# Altium PCB 驱动板.PcbDoc (part 3 of 3)
Units mil, origin at the board's own origin, x right, y up, seen from the top; angles counter-clockwise.
Board outline 6410.42 x 3130.03 mil, 2 copper layers (Top Layer, Bottom Layer); 60 components, 47 nets, 216 pads, 52 vias.
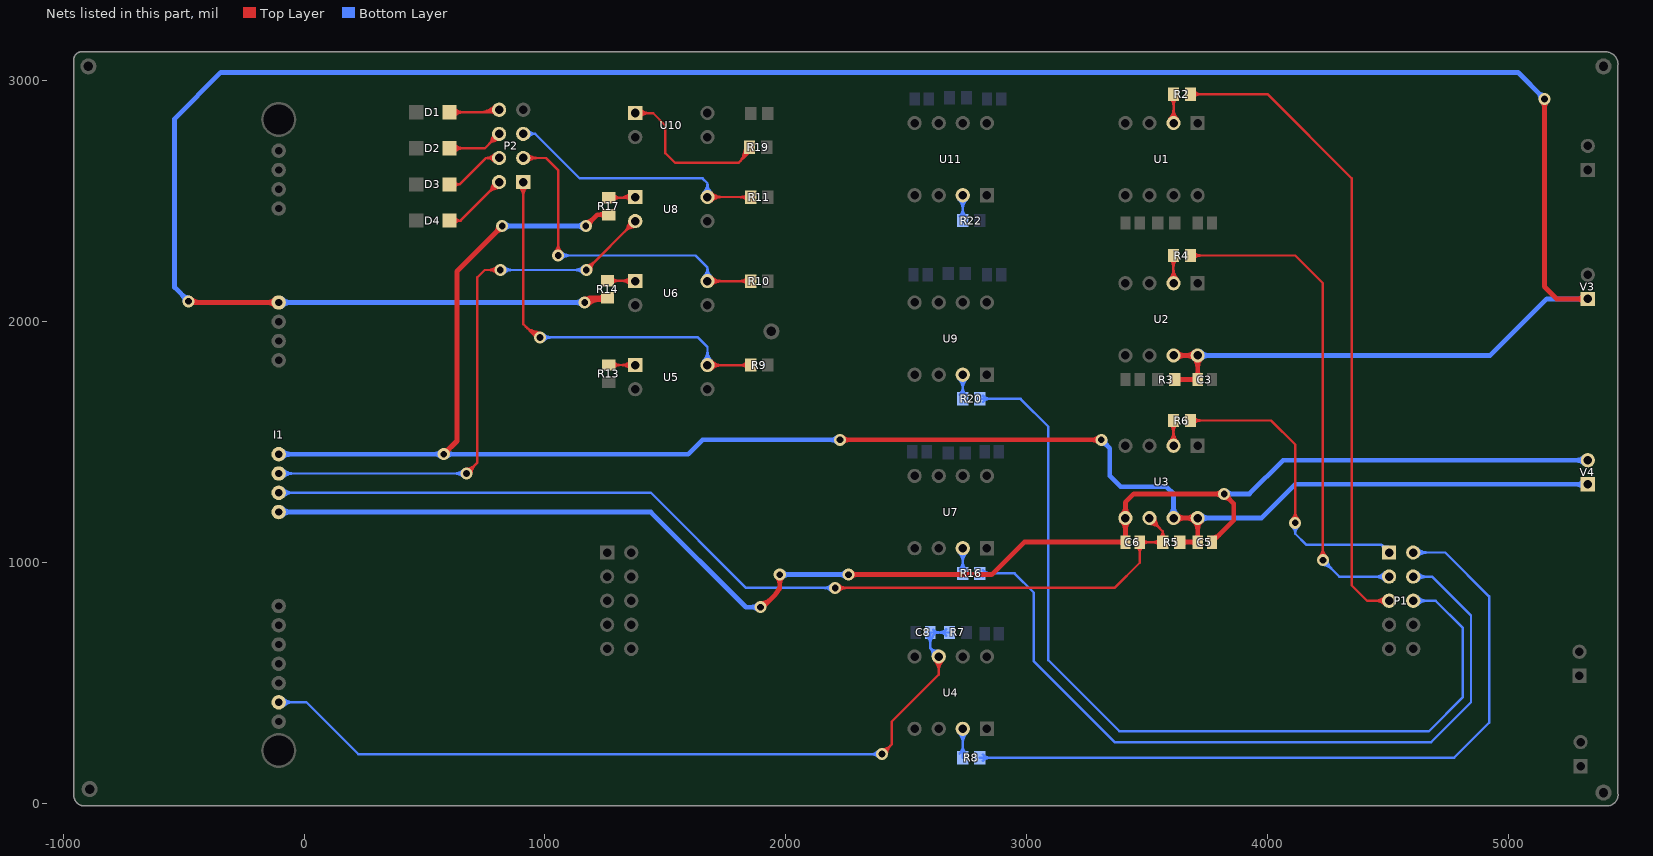
[diagram p3: the nets of this part, all layers, seen from the top]

## Via types
v1: diameter 50, hole 28, Top Layer to Bottom Layer, 52 vias

## Nets (pads, with @x,y where several pads share a name; then routed paths per layer and width w, separated by ;. In a path a pad name is that pad's centre, name@x,y a point inside that pad or via, vN(x,y) a via of type N, cw(c..) or ccw(c..) an arc to the next point about the centre after c; other vN are vias at no path point) (continued)
IPM_VVCC: C3.2 I1.5 R3.1 R14.2 U2.7 U2.8 V3.1 | length 13895.3
  Top Layer w20: v1(-480,2085) -475,2080 I1.5@-105,2080 ; v1(1165,2080) 1184.57,2099.57 ; v1@1168.88,2094.49 ccw(c1173.99,2113.54) 1183.85,2096.46 ; v1@1173,2092.69 ccw(c1194.45,2126.68) 1214.54,2091.87 ; v1@1179.88,2081.89 cw(c1197.09,2084.07) 1188.41,2099.1 ; 1219.19,2091.73 cw(c1229.45,2053.46) R14.2@1249.25,2087.77 ; 1228.38,2094.19 ccw(c1221.61,2119.46) R14.2@1244.27,2106.38 ; R14.2@1260,2099.57 1184.57,2099.57 ; U2.7@3610,1860 U2.8@3710,1860 3710.47,1859.53 C3.2@3710.47,1760 R3.1@3615.43,1760 ; v1(5150,2925) 5150,2145 5200,2095 V3.1@5330,2095 ; -153.28,2080 cw(c-153.28,2031.72) -119.14,2065.86 ccw(c-153.28,2031.72) -153.28,2080 ; -153.28,2080 ccw(c-153.28,2128.28) -119.14,2094.14 cw(c-153.28,2128.28) -153.28,2080 ; 1184.57,2099.57 cw(c1171.82,2112.31) 1168.1,2094.68 ccw(c1171.82,2112.31) 1184.57,2099.57 ; 1184.57,2099.57 ccw(c1197.31,2086.82) 1179.68,2083.1 cw(c1197.31,2086.82) 1184.57,2099.57 ; 1223.18,2099.57 cw(c1223.18,2066.68) 1246.43,2089.93 ccw(c1223.18,2066.68) 1223.18,2099.57 ; 1223.18,2099.57 ccw(c1223.18,2132.45) 1246.43,2109.2 cw(c1223.18,2132.45) 1223.18,2099.57 ; 3648.32,1760 cw(c3648.32,1792.89) 3625.07,1769.63 ccw(c3648.32,1792.89) 3648.32,1760 ; 3648.32,1760 ccw(c3648.32,1727.11) 3625.07,1750.37 cw(c3648.32,1727.11) 3648.32,1760 ; 3657.14,1860 cw(c3657.14,1907.14) 3623.81,1873.81 ccw(c3657.14,1907.14) 3657.14,1860 ; 3657.14,1860 ccw(c3657.14,1812.86) 3623.81,1846.19 cw(c3657.14,1812.86) 3657.14,1860 ; 3662.86,1860 cw(c3662.86,1812.86) U2.8@3696.19,1846.19 ; 3662.86,1860 ccw(c3662.86,1907.14) 3696.19,1873.81 cw(c3662.86,1907.14) 3662.86,1860 ; 3662.86,1860 cw(c3662.86,1812.86) U2.8@3696.19,1846.19 ; 3682.34,1760 cw(c3682.34,1731.87) 3702.23,1751.76 ccw(c3682.34,1731.87) 3682.34,1760 ; 3682.34,1760 ccw(c3682.34,1788.13) 3702.23,1768.24 cw(c3682.34,1788.13) 3682.34,1760 ; U2.8@3696.19,1846.19 cw(c3661.72,1811.72) 3710.47,1811.72 ccw(c3661.72,1811.72) U2.8@3696.19,1846.19 ; 3710.47,1794.04 cw(c3682.34,1794.04) 3702.23,1774.15 ccw(c3682.34,1794.04) 3710.47,1794.04 ; 3710.47,1794.04 ccw(c3738.61,1794.04) 3718.71,1774.15 cw(c3738.61,1794.04) 3710.47,1794.04 ; 5150,2888.79 cw(c5186.21,2888.79) 5160.61,2914.39 ccw(c5186.21,2888.79) 5150,2888.79 ; 5150,2888.79 ccw(c5113.79,2888.79) 5139.39,2914.39 cw(c5113.79,2888.79) 5150,2888.79 ; 5282.86,2095 cw(c5282.86,2047.86) 5316.19,2081.19 ccw(c5282.86,2047.86) 5282.86,2095 ; 5282.86,2095 ccw(c5282.86,2142.14) 5316.19,2108.81 cw(c5282.86,2142.14) 5282.86,2095 ; v1@-469.39,2095.61 ccw(c-431.72,2133.28) -431.72,2080 cw(c-431.72,2133.28) v1@-469.39,2095.61 ; v1@1161.46,2083.54 cw(c1200.17,2044.83) 1200.17,2099.57 ccw(c1200.17,2044.83) v1@1161.46,2083.54 ; v1@1175.61,2069.39 cw(c1248.45,1996.55) 1248.45,2099.57 ccw(c1248.45,1996.55) v1@1175.61,2069.39 ; 3710.47,1814 cw(c3756,1814) 3723.81,1846.19 ccw(c3756,1814) 3710.47,1814
  Bottom Layer w20: v1(-480,2085) -537.5,2142.5 -537.5,2842.5 -345,3035 5040,3035 v1@5145,2930 ; I1.5@-105,2080 v1(1165,2080) ; U2.8@3710,1860 4925,1860 5160,2095 V3.1@5330,2095 ; -505.61,2110.61 cw(c-531.21,2085) -495,2085 ccw(c-531.21,2085) -505.61,2110.61 ; -505.61,2110.61 ccw(c-480,2136.21) -480,2100 cw(c-480,2136.21) -505.61,2110.61 ; -56.72,2080 cw(c-56.72,2128.28) -90.86,2094.14 ccw(c-56.72,2128.28) -56.72,2080 ; -56.72,2080 ccw(c-56.72,2031.72) -90.86,2065.86 cw(c-56.72,2031.72) -56.72,2080 ; 1128.79,2080 cw(c1128.79,2043.79) 1154.39,2069.39 ccw(c1128.79,2043.79) 1128.79,2080 ; 1128.79,2080 ccw(c1128.79,2116.21) 1154.39,2090.61 cw(c1128.79,2116.21) 1128.79,2080 ; 3757.14,1860 cw(c3757.14,1907.14) 3723.81,1873.81 ccw(c3757.14,1907.14) 3757.14,1860 ; 3757.14,1860 ccw(c3757.14,1812.86) 3723.81,1846.19 cw(c3757.14,1812.86) 3757.14,1860 ; 5124.39,2950.61 cw(c5098.79,2925) 5135,2925 ccw(c5098.79,2925) 5124.39,2950.61 ; 5124.39,2950.61 ccw(c5150,2976.21) 5150,2940 cw(c5150,2976.21) 5124.39,2950.61 ; 5282.86,2095 cw(c5282.86,2047.86) 5316.19,2081.19 ccw(c5282.86,2047.86) 5282.86,2095 ; 5282.86,2095 ccw(c5282.86,2142.14) 5316.19,2108.81 cw(c5282.86,2142.14) 5282.86,2095
IPM_WFO: I1.10 U8.2 | length 4114.7
  Top Layer w10: 700.2,1396.75 ccw(c709.24,1362.99) v1(675,1370) ; 701.75,1395.2 cw(c667.99,1404.24) v1(675,1370) ; v1(815,2215) 750,2215 720,2185 720,1415 v1(675,1370) ; 1197.42,2241.75 ccw(c1206.47,2207.99) v1(1172.22,2215) ; 1198.97,2240.2 cw(c1165.21,2249.24) v1(1172.22,2215) ; 1344.48,2395.43 cw(c1381.61,2385.48) U8.2@1373.9,2423.14 ; 1352.65,2387.26 ccw(c1342.7,2424.39) U8.2@1380.36,2416.68 ; U8.2@1375,2417.78 v1(1172.22,2215) ; 709.14,1404.14 cw(c675,1438.28) 675,1390 ccw(c675,1438.28) 709.14,1404.14 ; 709.14,1404.14 ccw(c743.28,1370) 695,1370 cw(c743.28,1370) 709.14,1404.14 ; 766.72,2215 cw(c766.72,2166.72) 800.86,2200.86 ccw(c766.72,2166.72) 766.72,2215 ; 766.72,2215 ccw(c766.72,2263.28) 800.86,2229.14 cw(c766.72,2263.28) 766.72,2215 ; 1206.36,2249.14 cw(c1172.22,2283.28) 1172.22,2235 ccw(c1172.22,2283.28) 1206.36,2249.14 ; 1206.36,2249.14 ccw(c1240.51,2215) 1192.22,2215 cw(c1240.51,2215) 1206.36,2249.14 ; 1333.13,2375.91 cw(c1375,2334.04) 1375,2393.25 ccw(c1375,2334.04) 1333.13,2375.91 ; 1333.13,2375.91 ccw(c1291.26,2417.78) 1350.47,2417.78 cw(c1291.26,2417.78) 1333.13,2375.91 ; 1350.2,2392.98 cw(c1375,2368.18) 1375,2403.25 ccw(c1375,2368.18) 1350.2,2392.98 ; 1350.2,2392.98 ccw(c1325.4,2417.78) 1360.47,2417.78 cw(c1325.4,2417.78) 1350.2,2392.98
  Bottom Layer w10: I1.10@-105,1370 v1(675,1370) ; v1(815,2215) v1(1172.22,2215) ; -68.79,1370 cw(c-68.79,1406.21) -94.39,1380.61 ccw(c-68.79,1406.21) -68.79,1370 ; -68.79,1370 ccw(c-68.79,1333.79) -94.39,1359.39 cw(c-68.79,1333.79) -68.79,1370 ; -44.64,1370 cw(c-44.64,1430.36) -87.32,1387.68 ccw(c-44.64,1430.36) -44.64,1370 ; -44.64,1370 ccw(c-44.64,1309.64) -87.32,1352.32 cw(c-44.64,1309.64) -44.64,1370 ; 626.72,1370 cw(c626.72,1321.72) 660.86,1355.86 ccw(c626.72,1321.72) 626.72,1370 ; 626.72,1370 ccw(c626.72,1418.28) 660.86,1384.14 cw(c626.72,1418.28) 626.72,1370 ; 863.28,2215 cw(c863.28,2263.28) 829.14,2229.14 ccw(c863.28,2263.28) 863.28,2215 ; 863.28,2215 ccw(c863.28,2166.72) 829.14,2200.86 cw(c863.28,2166.72) 863.28,2215 ; 1123.94,2215 cw(c1123.94,2166.72) 1158.08,2200.86 ccw(c1123.94,2166.72) 1123.94,2215 ; 1123.94,2215 ccw(c1123.94,2263.28) 1158.08,2229.14 cw(c1123.94,2263.28) 1123.94,2215
IPM_WGND: C5.1 C6.1 I1.12 U3.5 V4.2 | length 8081
  Top Layer w20: v1(1895,815) 1915,825 1955,865 1975,895 v1(1975,950) ; v1(2260,950) 2855,950 2990,1085 C6.1@3410.47,1085 3410.47,1184.53 U3.5@3410,1185 3410,1250 3445,1285 v1(3820,1285) 3860,1245 3860,1175.47 C5.1@3769.53,1085 ; 1975,913.79 cw(c2011.21,913.79) 1985.61,939.39 ccw(c2011.21,913.79) 1975,913.79 ; 1975,913.79 ccw(c1938.79,913.79) 1964.39,939.39 cw(c1938.79,913.79) 1975,913.79 ; 2296.21,950 cw(c2296.21,986.21) 2270.61,960.61 ccw(c2296.21,986.21) 2296.21,950 ; 2296.21,950 ccw(c2296.21,913.79) 2270.61,939.39 cw(c2296.21,913.79) 2296.21,950 ; 3382.34,1085 cw(c3382.34,1056.87) 3402.23,1076.76 ccw(c3382.34,1056.87) 3382.34,1085 ; 3382.34,1085 ccw(c3382.34,1113.13) 3402.23,1093.24 cw(c3382.34,1113.13) 3382.34,1085 ; 3410,1232.14 cw(c3362.86,1232.14) 3396.19,1198.81 ccw(c3362.86,1232.14) 3410,1232.14 ; 3410,1232.14 ccw(c3457.14,1232.14) 3423.81,1198.81 cw(c3457.14,1232.14) 3410,1232.14 ; 3410.47,1119.04 cw(c3382.34,1119.04) 3402.23,1099.15 ccw(c3382.34,1119.04) 3410.47,1119.04 ; 3410.47,1119.04 ccw(c3438.61,1119.04) 3418.71,1099.15 cw(c3438.61,1119.04) 3410.47,1119.04 ; 3783.79,1285 cw(c3783.79,1248.79) 3809.39,1274.39 ccw(c3783.79,1248.79) 3783.79,1285 ; 3783.79,1285 ccw(c3783.79,1321.21) 3809.39,1295.61 cw(c3783.79,1321.21) 3783.79,1285 ; 3845.61,1259.39 cw(c3871.21,1285) 3835,1285 ccw(c3871.21,1285) 3845.61,1259.39 ; 3845.61,1259.39 ccw(c3820,1233.79) 3820,1270 cw(c3820,1233.79) 3845.61,1259.39 ; v1@1895,830 ccw(c1895,890.36) 1937.68,847.68 cw(c1895,890.36) v1@1895,830 ; U3.5@3396.19,1171.19 cw(c3361.72,1136.72) 3410.47,1136.72 ccw(c3361.72,1136.72) U3.5@3396.19,1171.19 ; 3410.47,1139 cw(c3456,1139) 3423.81,1171.19 ccw(c3456,1139) 3410.47,1139 ; C5.1@3769.53,1102.56 ccw(c3769.53,1144.95) 3799.5,1114.98 cw(c3769.53,1144.95) C5.1@3769.53,1102.56
  Bottom Layer w20: I1.12@-105,1210 1440,1210 1835,815 v1(1895,815) ; v1(1975,950) v1(2260,950) ; v1(3820,1285) 3925,1285 4065,1425 V4.2@5330,1425 ; -56.72,1210 cw(c-56.72,1258.28) -90.86,1224.14 ccw(c-56.72,1258.28) -56.72,1210 ; -56.72,1210 ccw(c-56.72,1161.72) -90.86,1195.86 cw(c-56.72,1161.72) -56.72,1210 ; 1858.79,815 cw(c1858.79,778.79) 1884.39,804.39 ccw(c1858.79,778.79) 1858.79,815 ; 1858.79,815 ccw(c1858.79,851.21) 1884.39,825.61 cw(c1858.79,851.21) 1858.79,815 ; 2011.21,950 cw(c2011.21,986.21) 1985.61,960.61 ccw(c2011.21,986.21) 2011.21,950 ; 2011.21,950 ccw(c2011.21,913.79) 1985.61,939.39 cw(c2011.21,913.79) 2011.21,950 ; 2223.79,950 cw(c2223.79,913.79) 2249.39,939.39 ccw(c2223.79,913.79) 2223.79,950 ; 2223.79,950 ccw(c2223.79,986.21) 2249.39,960.61 cw(c2223.79,986.21) 2223.79,950 ; 3856.21,1285 cw(c3856.21,1321.21) 3830.61,1295.61 ccw(c3856.21,1321.21) 3856.21,1285 ; 3856.21,1285 ccw(c3856.21,1248.79) 3830.61,1274.39 cw(c3856.21,1248.79) 3856.21,1285 ; 5282.86,1425 cw(c5282.86,1377.86) 5316.19,1411.19 ccw(c5282.86,1377.86) 5282.86,1425 ; 5282.86,1425 ccw(c5282.86,1472.14) 5316.19,1438.81 cw(c5282.86,1472.14) 5282.86,1425
IPM_WN: C8.2 I1.18 R7.2 U4.6 | length 4891.5
  Top Layer w10: 2425.2,231.75 ccw(c2434.24,197.99) v1(2400,205) ; 2426.75,230.2 cw(c2392.99,239.24) v1(2400,205) ; U4.6@2635,610 2635,535 2440,340 2440,245 v1(2400,205) ; 2434.14,239.14 cw(c2400,273.28) 2400,225 ccw(c2400,273.28) 2434.14,239.14 ; 2434.14,239.14 ccw(c2468.28,205) 2420,205 cw(c2468.28,205) 2434.14,239.14 ; 2635,550.79 cw(c2694.21,550.79) 2652.34,592.66 ccw(c2694.21,550.79) 2635,550.79 ; 2635,550.79 ccw(c2575.79,550.79) 2617.66,592.66 cw(c2575.79,550.79) 2635,550.79 ; 2635,574.93 cw(c2670.07,574.93) 2645.27,599.73 ccw(c2670.07,574.93) 2635,574.93 ; 2635,574.93 ccw(c2599.93,574.93) 2624.73,599.73 cw(c2599.93,574.93) 2635,574.93
  Bottom Layer w10: I1.18@-105,420 10,420 225,205 v1(2400,205) ; U4.6@2635,610 2599.53,645.47 ; R7.2@2679.57,710 C8.2@2599.53,710 2599.53,645.47 ; -68.79,420 cw(c-68.79,456.21) -94.39,430.61 ccw(c-68.79,456.21) -68.79,420 ; -68.79,420 ccw(c-68.79,383.79) -94.39,409.39 cw(c-68.79,383.79) -68.79,420 ; -44.64,420 cw(c-44.64,480.36) -87.32,437.68 ccw(c-44.64,480.36) -44.64,420 ; -44.64,420 ccw(c-44.64,359.64) -87.32,402.32 cw(c-44.64,359.64) -44.64,420 ; 2351.72,205 cw(c2351.72,156.72) 2385.86,190.86 ccw(c2351.72,156.72) 2351.72,205 ; 2351.72,205 ccw(c2351.72,253.28) 2385.86,219.14 cw(c2351.72,253.28) 2351.72,205 ; 2599.53,645.47 cw(c2571.93,617.87) 2610.66,613.04 ccw(c2571.93,617.87) 2599.53,645.47 ; 2599.53,645.47 ccw(c2627.13,673.07) 2631.96,634.34 cw(c2627.13,673.07) 2599.53,645.47 ; 2599.53,663.89 cw(c2639.73,663.89) 2611.3,692.32 ccw(c2639.73,663.89) 2599.53,663.89 ; 2599.53,663.89 ccw(c2559.32,663.89) 2587.75,692.32 cw(c2559.32,663.89) 2599.53,663.89 ; 2613.99,631.01 cw(c2597.64,614.66) 2620.58,611.8 ccw(c2597.64,614.66) 2613.99,631.01 ; 2613.99,631.01 ccw(c2630.34,647.36) 2633.2,624.42 cw(c2630.34,647.36) 2613.99,631.01 ; 2634.61,710 cw(c2634.61,665.04) 2666.4,696.83 ccw(c2634.61,665.04) 2634.61,710 ; 2634.61,710 ccw(c2634.61,754.96) 2666.4,723.17 cw(c2634.61,754.96) 2634.61,710 ; 2639.73,710 cw(c2639.73,750.21) 2611.3,721.78 ccw(c2639.73,750.21) 2639.73,710 ; 2639.73,710 ccw(c2639.73,669.79) 2611.3,698.22 cw(c2639.73,669.79) 2639.73,710
IPM_WP: C6.2 I1.11 R5.2 U3.6 | length 5591.1
  Top Layer w10: v1(2205,895) 3365,895 3469.53,999.53 C6.2@3469.53,1085 R5.2@3564.57,1085 3564.57,1130.43 ; U3.6@3504.64,1183.9 ccw(c3542.3,1191.61) 3532.35,1154.48 ; U3.6@3510,1185 3564.57,1130.43 ; U3.6@3511.1,1190.36 cw(c3503.39,1152.7) 3540.52,1162.65 ; 2253.28,895 cw(c2253.28,943.28) 2219.14,909.14 ccw(c2253.28,943.28) 2253.28,895 ; 2253.28,895 ccw(c2253.28,846.72) 2219.14,880.86 cw(c2253.28,846.72) 2253.28,895 ; 3469.53,1038.89 cw(c3509.73,1038.89) 3481.3,1067.32 ccw(c3509.73,1038.89) 3469.53,1038.89 ; 3469.53,1038.89 ccw(c3429.32,1038.89) 3457.75,1067.32 cw(c3429.32,1038.89) 3469.53,1038.89 ; 3509.73,1085 cw(c3509.73,1125.21) 3481.3,1096.78 ccw(c3509.73,1125.21) 3509.73,1085 ; 3509.73,1085 ccw(c3509.73,1044.79) 3481.3,1073.22 cw(c3509.73,1044.79) 3509.73,1085 ; 3519.61,1085 cw(c3519.61,1040.04) 3551.4,1071.83 ccw(c3519.61,1040.04) 3519.61,1085 ; 3519.61,1085 ccw(c3519.61,1129.96) 3551.4,1098.17 cw(c3519.61,1129.96) 3519.61,1085 ; 3534.8,1160.2 cw(c3559.6,1185) 3524.53,1185 ccw(c3559.6,1185) 3534.8,1160.2 ; 3534.8,1160.2 ccw(c3510,1135.4) 3510,1170.47 cw(c3510,1135.4) 3534.8,1160.2 ; 3551.87,1143.13 cw(c3593.74,1185) 3534.53,1185 ccw(c3593.74,1185) 3551.87,1143.13 ; 3551.87,1143.13 ccw(c3510,1101.26) 3510,1160.47 cw(c3510,1101.26) 3551.87,1143.13 ; 3564.57,1130.43 cw(c3527.65,1130.43) 3552.19,1102.85 ccw(c3527.65,1130.43) 3564.57,1130.43 ; 3564.57,1130.43 ccw(c3601.49,1130.43) 3576.94,1102.85 cw(c3601.49,1130.43) 3564.57,1130.43
  Bottom Layer w10: I1.11@-105,1290 1440,1290 1835,895 v1(2205,895) ; -68.79,1290 cw(c-68.79,1326.21) -94.39,1300.61 ccw(c-68.79,1326.21) -68.79,1290 ; -68.79,1290 ccw(c-68.79,1253.79) -94.39,1279.39 cw(c-68.79,1253.79) -68.79,1290 ; -44.64,1290 cw(c-44.64,1350.36) -87.32,1307.68 ccw(c-44.64,1350.36) -44.64,1290 ; -44.64,1290 ccw(c-44.64,1229.64) -87.32,1272.32 cw(c-44.64,1229.64) -44.64,1290 ; 2156.72,895 cw(c2156.72,846.72) 2190.86,880.86 ccw(c2156.72,846.72) 2156.72,895 ; 2156.72,895 ccw(c2156.72,943.28) 2190.86,909.14 cw(c2156.72,943.28) 2156.72,895
IPM_WVCC: C5.2 I1.9 R5.1 R17.2 U3.7 U3.8 V4.1 | length 10138.7
  Top Layer w20: v1(580,1450) 635,1505 635,2210 v1(822.5,2397.5) ; v1(1170,2397.5) 1217.07,2444.57 R17.2@1265,2444.57 ; v1(2225,1510) v1(3310,1510) ; U3.7@3610,1185 U3.8@3710,1185 3710.47,1184.53 C5.2@3710.47,1085 R5.1@3635.43,1085 ; 605.61,1475.61 cw(c580,1501.21) 580,1465 ccw(c580,1501.21) 605.61,1475.61 ; 605.61,1475.61 ccw(c631.21,1450) 595,1450 cw(c631.21,1450) 605.61,1475.61 ; 796.89,2371.89 cw(c822.5,2346.29) 822.5,2382.5 ccw(c822.5,2346.29) 796.89,2371.89 ; 796.89,2371.89 ccw(c771.29,2397.5) 807.5,2397.5 cw(c771.29,2397.5) 796.89,2371.89 ; 1195.61,2423.11 cw(c1170,2448.71) 1170,2412.5 ccw(c1170,2448.71) 1195.61,2423.11 ; 1195.61,2423.11 ccw(c1221.21,2397.5) 1185,2397.5 cw(c1221.21,2397.5) 1195.61,2423.11 ; 1228.18,2444.57 cw(c1228.18,2411.68) 1251.43,2434.93 ccw(c1228.18,2411.68) 1228.18,2444.57 ; 1228.18,2444.57 ccw(c1228.18,2477.45) 1251.43,2454.2 cw(c1228.18,2477.45) 1228.18,2444.57 ; 2261.21,1510 cw(c2261.21,1546.21) 2235.61,1520.61 ccw(c2261.21,1546.21) 2261.21,1510 ; 2261.21,1510 ccw(c2261.21,1473.79) 2235.61,1499.39 cw(c2261.21,1473.79) 2261.21,1510 ; 3273.79,1510 cw(c3273.79,1473.79) 3299.39,1499.39 ccw(c3273.79,1473.79) 3273.79,1510 ; 3273.79,1510 ccw(c3273.79,1546.21) 3299.39,1520.61 cw(c3273.79,1546.21) 3273.79,1510 ; 3657.14,1185 cw(c3657.14,1232.14) 3623.81,1198.81 ccw(c3657.14,1232.14) 3657.14,1185 ; 3657.14,1185 ccw(c3657.14,1137.86) 3623.81,1171.19 cw(c3657.14,1137.86) 3657.14,1185 ; 3662.86,1185 cw(c3662.86,1137.86) U3.8@3696.19,1171.19 ; 3662.86,1185 ccw(c3662.86,1232.14) 3696.19,1198.81 cw(c3662.86,1232.14) 3662.86,1185 ; 3662.86,1185 cw(c3662.86,1137.86) U3.8@3696.19,1171.19 ; 3668.32,1085 cw(c3668.32,1117.89) 3645.07,1094.63 ccw(c3668.32,1117.89) 3668.32,1085 ; 3668.32,1085 ccw(c3668.32,1052.11) 3645.07,1075.37 cw(c3668.32,1052.11) 3668.32,1085 ; 3682.34,1085 cw(c3682.34,1056.87) 3702.23,1076.76 ccw(c3682.34,1056.87) 3682.34,1085 ; 3682.34,1085 ccw(c3682.34,1113.13) 3702.23,1093.24 cw(c3682.34,1113.13) 3682.34,1085 ; U3.8@3696.19,1171.19 cw(c3661.72,1136.72) 3710.47,1136.72 ccw(c3661.72,1136.72) U3.8@3696.19,1171.19 ; 3710.47,1119.04 cw(c3682.34,1119.04) 3702.23,1099.15 ccw(c3682.34,1119.04) 3710.47,1119.04 ; 3710.47,1119.04 ccw(c3738.61,1119.04) 3718.71,1099.15 cw(c3738.61,1119.04) 3710.47,1119.04 ; 3710.47,1139 cw(c3756,1139) 3723.81,1171.19 ccw(c3756,1139) 3710.47,1139
  Bottom Layer w20: I1.9@-105,1450 v1(580,1450) 1595,1450 1655,1510 v1(2225,1510) ; v1(822.5,2397.5) v1(1170,2397.5) ; v1(3310,1510) 3345,1475 3345,1360 3390,1315 3580,1315 3610,1285 U3.7@3610,1185 ; U3.8@3710,1185 3975,1185 4115,1325 V4.1@5330,1325 ; -56.72,1450 cw(c-56.72,1498.28) -90.86,1464.14 ccw(c-56.72,1498.28) -56.72,1450 ; -56.72,1450 ccw(c-56.72,1401.72) -90.86,1435.86 cw(c-56.72,1401.72) -56.72,1450 ; 543.79,1450 cw(c543.79,1413.79) 569.39,1439.39 ccw(c543.79,1413.79) 543.79,1450 ; 543.79,1450 ccw(c543.79,1486.21) 569.39,1460.61 cw(c543.79,1486.21) 543.79,1450 ; 616.21,1450 cw(c616.21,1486.21) 590.61,1460.61 ccw(c616.21,1486.21) 616.21,1450 ; 616.21,1450 ccw(c616.21,1413.79) 590.61,1439.39 cw(c616.21,1413.79) 616.21,1450 ; 858.71,2397.5 cw(c858.71,2433.71) 833.11,2408.11 ccw(c858.71,2433.71) 858.71,2397.5 ; 858.71,2397.5 ccw(c858.71,2361.29) 833.11,2386.89 cw(c858.71,2361.29) 858.71,2397.5 ; 1133.79,2397.5 cw(c1133.79,2361.29) 1159.39,2386.89 ccw(c1133.79,2361.29) 1133.79,2397.5 ; 1133.79,2397.5 ccw(c1133.79,2433.71) 1159.39,2408.11 cw(c1133.79,2433.71) 1133.79,2397.5 ; 2188.79,1510 cw(c2188.79,1473.79) 2214.39,1499.39 ccw(c2188.79,1473.79) 2188.79,1510 ; 2188.79,1510 ccw(c2188.79,1546.21) 2214.39,1520.61 cw(c2188.79,1546.21) 2188.79,1510 ; 3335.61,1484.39 cw(c3361.21,1510) 3325,1510 ccw(c3361.21,1510) 3335.61,1484.39 ; 3335.61,1484.39 ccw(c3310,1458.79) 3310,1495 cw(c3310,1458.79) 3335.61,1484.39 ; 3610,1232.14 cw(c3562.86,1232.14) 3596.19,1198.81 ccw(c3562.86,1232.14) 3610,1232.14 ; 3610,1232.14 ccw(c3657.14,1232.14) 3623.81,1198.81 cw(c3657.14,1232.14) 3610,1232.14 ; 3757.14,1185 cw(c3757.14,1232.14) 3723.81,1198.81 ccw(c3757.14,1232.14) 3757.14,1185 ; 3757.14,1185 ccw(c3757.14,1137.86) 3723.81,1171.19 cw(c3757.14,1137.86) 3757.14,1185 ; 5282.86,1325 cw(c5282.86,1277.86) 5316.19,1311.19 ccw(c5282.86,1277.86) 5282.86,1325 ; 5282.86,1325 ccw(c5282.86,1372.14) 5316.19,1338.81 cw(c5282.86,1372.14) 5282.86,1325
NetD1_1: D1.1 P2.8 | length 872
  Top Layer w10: D1.1@603.9,2870 800,2870 P2.8@810,2880 ; 638.97,2870 cw(c638.97,2905.07) 614.17,2880.27 ccw(c638.97,2905.07) 638.97,2870 ; 638.97,2870 ccw(c638.97,2834.93) 614.17,2859.73 cw(c638.97,2834.93) 638.97,2870 ; 663.11,2870 cw(c663.11,2929.21) 621.24,2887.34 ccw(c663.11,2929.21) 663.11,2870 ; 663.11,2870 ccw(c663.11,2810.79) 621.24,2852.66 cw(c663.11,2810.79) 663.11,2870 ; 774.93,2870 cw(c774.93,2844.93) 792.66,2862.66 ccw(c774.93,2844.93) 774.93,2870 ; 774.93,2870 ccw(c774.93,2915.07) 806.8,2883.2 cw(c774.93,2915.07) 774.93,2870 ; 726.64,2870 ccw(c726.64,2963.36) 792.66,2897.34 cw(c726.64,2963.36) 726.64,2870 ; 750.79,2870 ccw(c750.79,2939.21) 799.73,2890.27 cw(c750.79,2939.21) 750.79,2870
NetD2_1: D2.1 P2.6 | length 908.5
  Top Layer w10: D2.1@603.9,2720 750,2720 P2.6@810,2780 ; 779.48,2757.65 cw(c816.61,2747.7) P2.6@808.9,2785.36 ; 787.65,2749.48 ccw(c777.7,2786.61) P2.6@815.36,2778.9 ; 638.97,2720 cw(c638.97,2755.07) 614.17,2730.27 ccw(c638.97,2755.07) 638.97,2720 ; 638.97,2720 ccw(c638.97,2684.93) 614.17,2709.73 cw(c638.97,2684.93) 638.97,2720 ; 663.11,2720 cw(c663.11,2779.21) 621.24,2737.34 ccw(c663.11,2779.21) 663.11,2720 ; 663.11,2720 ccw(c663.11,2660.79) 621.24,2702.66 cw(c663.11,2660.79) 663.11,2720 ; 768.13,2738.13 cw(c810,2696.26) 810,2755.47 ccw(c810,2696.26) 768.13,2738.13 ; 768.13,2738.13 ccw(c726.26,2780) 785.47,2780 cw(c726.26,2780) 768.13,2738.13 ; 785.2,2755.2 cw(c810,2730.4) 810,2765.47 ccw(c810,2730.4) 785.2,2755.2 ; 785.2,2755.2 ccw(c760.4,2780) 795.47,2780 cw(c760.4,2780) 785.2,2755.2
NetD3_1: D3.1 P2.4 | length 611.1
  Top Layer w10: D3.1@603.9,2570 645,2570 ; P2.4@810,2680 755,2680 ; 645,2570 cw(c645,2592.17) 625.48,2581.65 ccw(c645,2592.17) 645,2570 ; 645,2570 ccw(c645,2547.83) 625.48,2558.35 cw(c645,2547.83) 645,2570 ; 645,2570 755,2680 ; 755,2680 cw(c755,2630.61) 791.75,2663.61 ccw(c755,2630.61) 755,2680 ; 755,2680 ccw(c755,2729.39) 791.75,2696.39 cw(c755,2729.39) 755,2680 ; 777.43,2680 cw(c777.43,2650.74) 799.19,2670.29 ccw(c777.43,2650.74) 777.43,2680 ; 777.43,2680 ccw(c777.43,2709.26) 799.19,2689.71 cw(c777.43,2709.26) 777.43,2680
NetD4_1: D4.1 P2.2 | length 775.2
  Top Layer w10: D4.1@603.9,2420 650,2420 ; 779.48,2557.65 cw(c816.61,2547.7) P2.2@808.9,2585.36 ; 787.65,2549.48 ccw(c777.7,2586.61) P2.2@815.36,2578.9 ; P2.2@810,2580 650,2420 ; 650,2420 cw(c650,2451.06) 624.24,2433.7 ccw(c650,2451.06) 650,2420 ; 650,2420 ccw(c650,2388.94) 624.24,2406.3 cw(c650,2388.94) 650,2420 ; 768.13,2538.13 cw(c810,2496.26) 810,2555.47 ccw(c810,2496.26) 768.13,2538.13 ; 768.13,2538.13 ccw(c726.26,2580) 785.47,2580 cw(c726.26,2580) 768.13,2538.13 ; 785.2,2555.2 cw(c810,2530.4) 810,2565.47 ccw(c810,2530.4) 785.2,2555.2 ; 785.2,2555.2 ccw(c760.4,2580) 795.47,2580 cw(c760.4,2580) 785.2,2555.2
NetR2_2: R2.2 U1.2 | length 557.6
  Top Layer w10: R2.2@3609.57,2945 3610,2944.57 U1.2@3610,2825 ; 3610,2860.07 cw(c3574.93,2860.07) 3599.73,2835.27 ccw(c3574.93,2860.07) 3610,2860.07 ; 3610,2860.07 ccw(c3645.07,2860.07) 3620.27,2835.27 cw(c3645.07,2860.07) 3610,2860.07 ; 3610,2884.21 cw(c3550.79,2884.21) 3592.66,2842.34 ccw(c3550.79,2884.21) 3610,2884.21 ; 3610,2884.21 ccw(c3669.21,2884.21) 3627.34,2842.34 cw(c3669.21,2884.21) 3610,2884.21 ; R2.2@3596.4,2927.9 cw(c3563.56,2895.06) 3610,2895.06 ccw(c3563.56,2895.06) R2.2@3596.4,2927.9 ; 3610,2897.15 cw(c3653.48,2897.15) 3622.73,2927.9 ccw(c3653.48,2897.15) 3610,2897.15
NetR4_2: R4.2 U2.2 | length 552.6
  Top Layer w10: R4.2@3609.57,2275 3609.57,2160.43 U2.2@3610,2160 ; 3609.57,2226.11 cw(c3654.52,2226.11) 3622.73,2257.9 ccw(c3654.52,2226.11) 3609.57,2226.11 ; 3609.57,2226.11 ccw(c3564.61,2226.11) 3596.4,2257.9 cw(c3564.61,2226.11) 3609.57,2226.11 ; U2.2@3592.66,2177.34 ccw(c3551.83,2218.17) 3609.57,2218.17 cw(c3551.83,2218.17) U2.2@3592.66,2177.34 ; U2.2@3599.73,2170.27 ccw(c3575.98,2194.02) 3609.57,2194.02 cw(c3575.98,2194.02) U2.2@3599.73,2170.27 ; 3609.57,2196.12 ccw(c3646.12,2196.12) 3620.27,2170.27 cw(c3646.12,2196.12) 3609.57,2196.12 ; 3609.57,2220.26 ccw(c3670.26,2220.26) 3627.34,2177.34 cw(c3670.26,2220.26) 3609.57,2220.26
NetR6_2: R6.2 U3.2 | length 542.6
  Top Layer w10: R6.2@3609.57,1590 3609.57,1485.43 U3.2@3610,1485 ; 3609.57,1541.11 cw(c3654.52,1541.11) 3622.73,1572.9 ccw(c3654.52,1541.11) 3609.57,1541.11 ; 3609.57,1541.11 ccw(c3564.61,1541.11) 3596.4,1572.9 cw(c3564.61,1541.11) 3609.57,1541.11 ; U3.2@3592.66,1502.34 ccw(c3551.83,1543.17) 3609.57,1543.17 cw(c3551.83,1543.17) U3.2@3592.66,1502.34 ; U3.2@3599.73,1495.27 ccw(c3575.98,1519.02) 3609.57,1519.02 cw(c3575.98,1519.02) U3.2@3599.73,1495.27 ; 3609.57,1521.12 ccw(c3646.12,1521.12) 3620.27,1495.27 cw(c3646.12,1521.12) 3609.57,1521.12 ; 3609.57,1545.26 ccw(c3670.26,1545.26) 3627.34,1502.34 cw(c3670.26,1545.26) 3609.57,1545.26
NetR8_2: R8.2 U4.2 | length 557.6
  Bottom Layer w10: R8.2@2734.57,190 2734.57,309.57 U4.2@2735,310 ; 2734.57,238.89 cw(c2689.61,238.89) 2721.4,207.1 ccw(c2689.61,238.89) 2734.57,238.89 ; 2734.57,238.89 ccw(c2779.52,238.89) 2747.73,207.1 cw(c2779.52,238.89) 2734.57,238.89 ; U4.2@2717.66,292.66 cw(c2676.83,251.83) 2734.57,251.83 ccw(c2676.83,251.83) U4.2@2717.66,292.66 ; U4.2@2724.73,299.73 cw(c2700.98,275.98) 2734.57,275.98 ccw(c2700.98,275.98) U4.2@2724.73,299.73 ; 2734.57,249.74 cw(c2795.26,249.74) 2752.34,292.66 ccw(c2795.26,249.74) 2734.57,249.74 ; 2734.57,273.88 cw(c2771.12,273.88) 2745.27,299.73 ccw(c2771.12,273.88) 2734.57,273.88
NetR13_1: R13.1 U5.1 | length 547.6
  Top Layer w10: R13.1@1265,1820.43 1374.57,1820.43 U5.1@1375,1820 ; 1313.89,1820.43 cw(c1313.89,1865.39) 1282.1,1833.6 ccw(c1313.89,1865.39) 1313.89,1820.43 ; 1313.89,1820.43 ccw(c1313.89,1775.48) 1282.1,1807.27 cw(c1313.89,1775.48) 1313.89,1820.43 ; 1314.74,1820.43 cw(c1314.74,1759.74) 1357.66,1802.66 ccw(c1314.74,1759.74) 1314.74,1820.43 ; 1316.83,1820.43 ccw(c1316.83,1878.17) 1357.66,1837.34 cw(c1316.83,1878.17) 1316.83,1820.43 ; 1338.88,1820.43 cw(c1338.88,1783.88) 1364.73,1809.73 ccw(c1338.88,1783.88) 1338.88,1820.43 ; 1340.97,1820.43 ccw(c1340.97,1854.03) 1364.73,1830.27 cw(c1340.97,1854.03) 1340.97,1820.43
NetR14_1: R14.1 U6.1 | length 553.1
  Top Layer w10: R14.1@1260,2170.43 1373.46,2170.43 U6.1@1375,2168.89 ; 1308.89,2170.43 cw(c1308.89,2215.39) 1277.1,2183.6 ccw(c1308.89,2215.39) 1308.89,2170.43 ; 1308.89,2170.43 ccw(c1308.89,2125.48) 1277.1,2157.27 cw(c1308.89,2125.48) 1308.89,2170.43 ; 1312.06,2170.43 cw(c1312.06,2105.95) 1357.66,2151.55 ccw(c1312.06,2105.95) 1312.06,2170.43 ; 1319.51,2170.43 ccw(c1319.51,2224.38) 1357.66,2186.23 cw(c1319.51,2224.38) 1319.51,2170.43 ; 1336.2,2170.43 cw(c1336.2,2130.09) 1364.73,2158.62 ccw(c1336.2,2130.09) 1336.2,2170.43 ; 1343.66,2170.43 ccw(c1343.66,2200.23) 1364.73,2179.16 cw(c1343.66,2200.23) 1343.66,2170.43
NetR16_2: R16.2 U7.2 | length 542.6
  Bottom Layer w10: R16.2@2734.57,955 2735,955.43 U7.2@2735,1060 ; 2735,1000.79 cw(c2794.21,1000.79) 2752.34,1042.66 ccw(c2794.21,1000.79) 2735,1000.79 ; 2735,1000.79 ccw(c2675.79,1000.79) 2717.66,1042.66 cw(c2675.79,1000.79) 2735,1000.79 ; 2735,1024.93 cw(c2770.07,1024.93) 2745.27,1049.73 ccw(c2770.07,1024.93) 2735,1024.93 ; 2735,1024.93 ccw(c2699.93,1024.93) 2724.73,1049.73 cw(c2699.93,1024.93) 2735,1024.93 ; R16.2@2721.4,972.1 ccw(c2688.56,1004.94) 2735,1004.94 cw(c2688.56,1004.94) R16.2@2721.4,972.1 ; 2735,1002.85 ccw(c2778.48,1002.85) 2747.73,972.1 cw(c2778.48,1002.85) 2735,1002.85
NetR17_1: R17.1 U8.1 | length 505.9
  Top Layer w10: R17.1@1265,2515.43 1372.66,2515.43 U8.1@1375,2517.78 ; 1313.89,2515.43 cw(c1313.89,2560.39) 1282.1,2528.6 ccw(c1313.89,2560.39) 1313.89,2515.43 ; 1313.89,2515.43 ccw(c1313.89,2470.48) 1282.1,2502.27 cw(c1313.89,2470.48) 1313.89,2515.43 ; 1310.12,2515.43 ccw(c1310.12,2582.65) 1357.66,2535.12 cw(c1310.12,2582.65) 1310.12,2515.43 ; 1321.45,2515.43 cw(c1321.45,2464.22) 1357.66,2500.43 ccw(c1321.45,2464.22) 1321.45,2515.43 ; 1334.27,2515.43 ccw(c1334.27,2558.51) 1364.73,2528.05 cw(c1334.27,2558.51) 1334.27,2515.43
NetR19_1: R19.1 U10.1 | length 1334.9
  Top Layer w10: U10.1@1373.77,2865.43 U10.1@1375,2866.67 1376.23,2865.43 1449.57,2865.43 1500,2815 1500,2700 1540,2660 1805,2660 1854.57,2709.57 R19.1@1854.57,2725 ; 1822.82,2690.72 cw(c1870.34,2677.99) R19.1@1848.97,2722.3 ; R19.1@1833.44,2711.75 cw(c1819.13,2703.49) R19.1@1835.09,2699.21 ; 1833.7,2694.03 cw(c1859.58,2687.1) R19.1@1852,2712.79 ; U10.1@1385.27,2856.39 cw(c1407.09,2834.57) 1407.09,2865.43 ccw(c1407.09,2834.57) U10.1@1385.27,2856.39 ; U10.1@1385.27,2876.94 ccw(c1413.05,2904.72) 1413.05,2865.43 cw(c1413.05,2904.72) U10.1@1385.27,2876.94 ; U10.1@1392.34,2849.32 cw(c1431.24,2810.43) 1431.24,2865.43 ccw(c1431.24,2810.43) U10.1@1392.34,2849.32 ; U10.1@1392.34,2884.01 ccw(c1437.19,2928.86) 1437.19,2865.43 cw(c1437.19,2928.86) U10.1@1392.34,2884.01 ; 1806.11,2661.11 ccw(c1746.16,2721.06) 1830.94,2721.06 cw(c1746.16,2721.06) 1806.11,2661.11 ; 1823.18,2678.18 ccw(c1780.3,2721.06) 1840.95,2721.06 cw(c1780.3,2721.06) 1823.18,2678.18 ; 1840.25,2695.25 ccw(c1814.45,2721.06) 1850.95,2721.06 cw(c1814.45,2721.06) 1840.25,2695.25
NetR20_2: R20.2 U9.2 | length 537.6
  Bottom Layer w10: R20.2@2734.57,1680 2735,1680.43 U9.2@2735,1780 ; 2735,1720.79 cw(c2794.21,1720.79) 2752.34,1762.66 ccw(c2794.21,1720.79) 2735,1720.79 ; 2735,1720.79 ccw(c2675.79,1720.79) 2717.66,1762.66 cw(c2675.79,1720.79) 2735,1720.79 ; 2735,1744.93 cw(c2770.07,1744.93) 2745.27,1769.73 ccw(c2770.07,1744.93) 2735,1744.93 ; 2735,1744.93 ccw(c2699.93,1744.93) 2724.73,1769.73 cw(c2699.93,1744.93) 2735,1744.93 ; R20.2@2721.4,1697.1 ccw(c2688.56,1729.94) 2735,1729.94 cw(c2688.56,1729.94) R20.2@2721.4,1697.1 ; 2735,1727.85 ccw(c2778.48,1727.85) 2747.73,1697.1 cw(c2778.48,1727.85) 2735,1727.85
NetR22_2: R22.2 U11.2 | length 542.6
  Bottom Layer w10: R22.2@2734.57,2420 2735,2420.43 U11.2@2735,2525 ; 2735,2465.79 cw(c2794.21,2465.79) 2752.34,2507.66 ccw(c2794.21,2465.79) 2735,2465.79 ; 2735,2465.79 ccw(c2675.79,2465.79) 2717.66,2507.66 cw(c2675.79,2465.79) 2735,2465.79 ; 2735,2489.93 cw(c2770.07,2489.93) 2745.27,2514.73 ccw(c2770.07,2489.93) 2735,2489.93 ; 2735,2489.93 ccw(c2699.93,2489.93) 2724.73,2514.73 cw(c2699.93,2489.93) 2735,2489.93 ; R22.2@2721.4,2437.1 ccw(c2688.56,2469.94) 2735,2469.94 cw(c2688.56,2469.94) R22.2@2721.4,2437.1 ; 2735,2467.85 ccw(c2778.48,2467.85) 2747.73,2437.1 cw(c2778.48,2467.85) 2735,2467.85
PWM_UN: P1.6 R20.1 | length 4181.2
  Bottom Layer w10: R20.1@2805.43,1680 2975,1680 3090,1565 3090,595 3385,300 4670,300 4810,440 4810,730 4698.15,841.85 P1.6@4605,841.85 ; 2850.39,1680 cw(c2850.39,1724.96) 2818.6,1693.17 ccw(c2850.39,1724.96) 2850.39,1680 ; 2850.39,1680 ccw(c2850.39,1635.04) 2818.6,1666.83 cw(c2850.39,1635.04) 2850.39,1680 ; 4640.07,841.85 cw(c4640.07,876.92) 4615.27,852.12 ccw(c4640.07,876.92) 4640.07,841.85 ; 4640.07,841.85 ccw(c4640.07,806.78) 4615.27,831.58 cw(c4640.07,806.78) 4640.07,841.85 ; 4664.21,841.85 cw(c4664.21,901.06) 4622.34,859.19 ccw(c4664.21,901.06) 4664.21,841.85 ; 4664.21,841.85 ccw(c4664.21,782.64) 4622.34,824.51 cw(c4664.21,782.64) 4664.21,841.85
PWM_UP: P1.5 R2.1 | length 3123.1
  Top Layer w10: R2.1@3680.43,2945 4000,2945 4350,2595 4350,905 4413.15,841.85 P1.5@4505,841.85 ; 3725.39,2945 cw(c3725.39,2989.96) 3693.6,2958.17 ccw(c3725.39,2989.96) 3725.39,2945 ; 3725.39,2945 ccw(c3725.39,2900.04) 3693.6,2931.83 cw(c3725.39,2900.04) 3725.39,2945 ; 4445.79,841.85 cw(c4445.79,782.64) 4487.66,824.51 ccw(c4445.79,782.64) 4445.79,841.85 ; 4445.79,841.85 ccw(c4445.79,901.06) 4487.66,859.19 cw(c4445.79,901.06) 4445.79,841.85 ; 4469.93,841.85 cw(c4469.93,806.78) 4494.73,831.58 ccw(c4469.93,806.78) 4469.93,841.85 ; 4469.93,841.85 ccw(c4469.93,876.92) 4494.73,852.12 cw(c4469.93,876.92) 4469.93,841.85
PWM_VN: P1.4 R16.1 | length 3669.3
  Bottom Layer w10: R16.1@2805.43,955 2950,955 3030,875 3030,590 3365,255 4680,255 4845,420 4845,780 4683.15,941.85 P1.4@4605,941.85 ; 2850.39,955 cw(c2850.39,999.96) 2818.6,968.17 ccw(c2850.39,999.96) 2850.39,955 ; 2850.39,955 ccw(c2850.39,910.04) 2818.6,941.83 cw(c2850.39,910.04) 2850.39,955 ; 4640.07,941.85 cw(c4640.07,976.92) 4615.27,952.12 ccw(c4640.07,976.92) 4640.07,941.85 ; 4640.07,941.85 ccw(c4640.07,906.78) 4615.27,931.58 cw(c4640.07,906.78) 4640.07,941.85 ; 4664.21,941.85 cw(c4664.21,1001.06) 4622.34,959.19 ccw(c4664.21,1001.06) 4664.21,941.85 ; 4664.21,941.85 ccw(c4664.21,882.64) 4622.34,924.51 cw(c4664.21,882.64) 4664.21,941.85
PWM_VP: P1.3 R4.1 | length 2868.7
  Top Layer w10: R4.1@3680.43,2275 4115,2275 4230,2160 v1(4230,1010) ; 3725.39,2275 cw(c3725.39,2319.96) 3693.6,2288.17 ccw(c3725.39,2319.96) 3725.39,2275 ; 3725.39,2275 ccw(c3725.39,2230.04) 3693.6,2261.83 cw(c3725.39,2230.04) 3725.39,2275 ; 4230,1058.28 cw(c4181.72,1058.28) 4215.86,1024.14 ccw(c4181.72,1058.28) 4230,1058.28 ; 4230,1058.28 ccw(c4278.28,1058.28) 4244.14,1024.14 cw(c4278.28,1058.28) 4230,1058.28
  Bottom Layer w10: 4255.2,983.25 cw(c4264.24,1017.01) v1(4230,1010) ; 4256.75,984.8 ccw(c4222.99,975.76) v1(4230,1010) ; P1.3@4505,941.85 4298.15,941.85 v1(4230,1010) ; 4264.14,975.86 cw(c4298.28,1010) 4250,1010 ccw(c4298.28,1010) 4264.14,975.86 ; 4264.14,975.86 ccw(c4230,941.72) 4230,990 cw(c4230,941.72) 4264.14,975.86 ; 4445.79,941.85 cw(c4445.79,882.64) 4487.66,924.51 ccw(c4445.79,882.64) 4445.79,941.85 ; 4445.79,941.85 ccw(c4445.79,1001.06) 4487.66,959.19 cw(c4445.79,1001.06) 4445.79,941.85 ; 4469.93,941.85 cw(c4469.93,906.78) 4494.73,931.58 ccw(c4469.93,906.78) 4469.93,941.85 ; 4469.93,941.85 ccw(c4469.93,976.92) 4494.73,952.12 cw(c4469.93,976.92) 4469.93,941.85
PWM_WN: P1.2 R8.1 | length 3527.4
  Bottom Layer w10: R8.1@2805.43,190 4775,190 4920,335 4920,860 4738.15,1041.85 P1.2@4605,1041.85 ; 2850.39,190 cw(c2850.39,234.96) 2818.6,203.17 ccw(c2850.39,234.96) 2850.39,190 ; 2850.39,190 ccw(c2850.39,145.04) 2818.6,176.83 cw(c2850.39,145.04) 2850.39,190 ; 4640.07,1041.85 cw(c4640.07,1076.92) 4615.27,1052.12 ccw(c4640.07,1076.92) 4640.07,1041.85 ; 4640.07,1041.85 ccw(c4640.07,1006.78) 4615.27,1031.58 cw(c4640.07,1006.78) 4640.07,1041.85 ; 4664.21,1041.85 cw(c4664.21,1101.06) 4622.34,1059.19 ccw(c4664.21,1101.06) 4664.21,1041.85 ; 4664.21,1041.85 ccw(c4664.21,982.64) 4622.34,1024.51 cw(c4664.21,982.64) 4664.21,1041.85
PWM_WP: P1.1 R6.1 | length 1822.7
  Top Layer w10: R6.1@3680.43,1590 4015,1590 4115,1490 v1(4115,1165) ; 3725.39,1590 cw(c3725.39,1634.96) 3693.6,1603.17 ccw(c3725.39,1634.96) 3725.39,1590 ; 3725.39,1590 ccw(c3725.39,1545.04) 3693.6,1576.83 cw(c3725.39,1545.04) 3725.39,1590 ; 4115,1213.28 cw(c4066.72,1213.28) 4100.86,1179.14 ccw(c4066.72,1213.28) 4115,1213.28 ; 4115,1213.28 ccw(c4163.28,1213.28) 4129.14,1179.14 cw(c4163.28,1213.28) 4115,1213.28
  Bottom Layer w10: v1(4115,1165) 4115,1120 ; P1.1@4505,1041.85 4471.85,1075 ; 4115,1120 cw(c4155.62,1120) 4128.4,1150.15 ccw(c4155.62,1120) 4115,1120 ; 4115,1120 ccw(c4074.38,1120) 4101.6,1150.15 cw(c4074.38,1120) 4115,1120 ; 4115,1120 4160,1075 4471.85,1075 ; 4471.85,1075 cw(c4448.85,1051.99) 4480.86,1046.21 ccw(c4448.85,1051.99) 4471.85,1075 ; 4471.85,1075 ccw(c4494.86,1098) 4500.64,1065.99 cw(c4494.86,1098) 4471.85,1075
UFO: P2.1 R9.2 U5.4 | length 3253.6
  Top Layer w10: P2.1@910,2580 910,1990 965,1935 v1(980,1935) ; 945.91,1964.14 cw(c932.43,1913.86) v1(980,1935) ; 950.13,1953 cw(c942.78,1925.58) v1@970.31,1932.55 ; 958.39,1950.79 ccw(c962.35,1965.58) v1@970,1952.32 ; 966.14,1958.71 cw(c957.06,1924.8) v1@989.14,1939.06 ; U5.4@1675,1820 R9.2@1854.57,1820 ; 910,2520.79 cw(c969.21,2520.79) 927.34,2562.66 ccw(c969.21,2520.79) 910,2520.79 ; 910,2520.79 ccw(c850.79,2520.79) 892.66,2562.66 cw(c850.79,2520.79) 910,2520.79 ; 910,2544.93 cw(c945.07,2544.93) 920.27,2569.73 ccw(c945.07,2544.93) 910,2544.93 ; 910,2544.93 ccw(c874.93,2544.93) 899.73,2569.73 cw(c874.93,2544.93) 910,2544.93 ; v1(980,1935) cw(c980,1971.21) 954.39,1945.61 ccw(c980,1971.21) v1(980,1935) ; 1710.07,1820 cw(c1710.07,1855.07) 1685.27,1830.27 ccw(c1710.07,1855.07) 1710.07,1820 ; 1710.07,1820 ccw(c1710.07,1784.93) 1685.27,1809.73 cw(c1710.07,1784.93) 1710.07,1820 ; 1734.21,1820 cw(c1734.21,1879.21) 1692.34,1837.34 ccw(c1734.21,1879.21) 1734.21,1820 ; 1734.21,1820 ccw(c1734.21,1760.79) 1692.34,1802.66 cw(c1734.21,1760.79) 1734.21,1820 ; 1809.61,1820 cw(c1809.61,1775.04) 1841.4,1806.83 ccw(c1809.61,1775.04) 1809.61,1820 ; 1809.61,1820 ccw(c1809.61,1864.96) 1841.4,1833.17 cw(c1809.61,1864.96) 1809.61,1820 ; 920.25,1979.75 ccw(c980,2039.5) 980,1955 cw(c980,2039.5) 920.25,1979.75 ; 937.32,1962.68 ccw(c980,2005.36) 980,1945 cw(c980,2005.36) 937.32,1962.68 ; 956.46,1943.54 cw(c947.93,1935) 960,1935 ccw(c947.93,1935) 956.46,1943.54
  Bottom Layer w10: v1(980,1935) 1635,1935 1675,1895 U5.4@1675,1820 ; 1028.28,1935 cw(c1028.28,1983.28) 994.14,1949.14 ccw(c1028.28,1983.28) 1028.28,1935 ; 1028.28,1935 ccw(c1028.28,1886.72) 994.14,1920.86 cw(c1028.28,1886.72) 1028.28,1935 ; 1675,1855.07 cw(c1639.93,1855.07) 1664.73,1830.27 ccw(c1639.93,1855.07) 1675,1855.07 ; 1675,1855.07 ccw(c1710.07,1855.07) 1685.27,1830.27 cw(c1710.07,1855.07) 1675,1855.07 ; 1675,1879.21 cw(c1615.79,1879.21) 1657.66,1837.34 ccw(c1615.79,1879.21) 1675,1879.21 ; 1675,1879.21 ccw(c1734.21,1879.21) 1692.34,1837.34 cw(c1734.21,1879.21) 1675,1879.21
VFO: P2.3 R10.2 U6.4 | length 2706.9
  Top Layer w10: P2.3@910,2680 1005,2680 1055,2630 v1(1055,2275) ; U6.4@1675,2168.89 1854.01,2168.89 R10.2@1854.57,2168.33 ; 945.07,2680 cw(c945.07,2715.07) 920.27,2690.27 ccw(c945.07,2715.07) 945.07,2680 ; 945.07,2680 ccw(c945.07,2644.93) 920.27,2669.73 cw(c945.07,2644.93) 945.07,2680 ; 969.21,2680 cw(c969.21,2739.21) 927.34,2697.34 ccw(c969.21,2739.21) 969.21,2680 ; 969.21,2680 ccw(c969.21,2620.79) 927.34,2662.66 cw(c969.21,2620.79) 969.21,2680 ; 1055,2323.28 cw(c1006.72,2323.28) 1040.86,2289.14 ccw(c1006.72,2323.28) 1055,2323.28 ; 1055,2323.28 ccw(c1103.28,2323.28) 1069.14,2289.14 cw(c1103.28,2323.28) 1055,2323.28 ; 1710.07,2168.89 cw(c1710.07,2203.96) 1685.27,2179.16 ccw(c1710.07,2203.96) 1710.07,2168.89 ; 1710.07,2168.89 ccw(c1710.07,2133.82) 1685.27,2158.62 cw(c1710.07,2133.82) 1710.07,2168.89 ; 1734.21,2168.89 cw(c1734.21,2228.1) 1692.34,2186.23 ccw(c1734.21,2228.1) 1734.21,2168.89 ; 1734.21,2168.89 ccw(c1734.21,2109.67) 1692.34,2151.55 cw(c1734.21,2109.67) 1734.21,2168.89 ; 1808.27,2168.89 cw(c1808.27,2122.03) 1841.4,2155.17 ccw(c1808.27,2122.03) 1808.27,2168.89 ; 1810.95,2168.89 ccw(c1810.95,2211.95) 1841.4,2181.5 cw(c1810.95,2211.95) 1810.95,2168.89
  Bottom Layer w10: v1(1055,2275) 1625,2275 1675,2225 ; U6.4@1675,2168.89 1675,2225 ; 1103.28,2275 cw(c1103.28,2323.28) 1069.14,2289.14 ccw(c1103.28,2323.28) 1103.28,2275 ; 1103.28,2275 ccw(c1103.28,2226.72) 1069.14,2260.86 cw(c1103.28,2226.72) 1103.28,2275 ; 1675,2202.12 cw(c1644.25,2202.12) 1665.13,2179.55 ccw(c1644.25,2202.12) 1675,2202.12 ; 1675,2202.12 ccw(c1705.75,2202.12) 1684.87,2179.55 cw(c1705.75,2202.12) 1675,2202.12 ; 1675,2225 cw(c1623.09,2225) 1658.34,2186.89 ccw(c1623.09,2225) 1675,2225 ; 1675,2225 ccw(c1726.91,2225) 1691.66,2186.89 cw(c1726.91,2225) 1675,2225
WFO: P2.5 R11.2 U8.4 | length 2030.5
  Top Layer w10: U8.4@1675,2517.78 1853.46,2517.78 R11.2@1854.57,2516.67 ; 1710.07,2517.78 cw(c1710.07,2552.85) 1685.27,2528.05 ccw(c1710.07,2552.85) 1710.07,2517.78 ; 1710.07,2517.78 ccw(c1710.07,2482.71) 1685.27,2507.51 cw(c1710.07,2482.71) 1710.07,2517.78 ; 1734.21,2517.78 cw(c1734.21,2576.99) 1692.34,2535.12 ccw(c1734.21,2576.99) 1734.21,2517.78 ; 1734.21,2517.78 ccw(c1734.21,2458.56) 1692.34,2500.43 cw(c1734.21,2458.56) 1734.21,2517.78 ; 1806.93,2517.78 cw(c1806.93,2469.03) 1841.4,2503.5 ccw(c1806.93,2469.03) 1806.93,2517.78 ; 1812.29,2517.78 ccw(c1812.29,2558.94) 1841.4,2529.83 cw(c1812.29,2558.94) 1812.29,2517.78
  Bottom Layer w10: P2.5@910,2780 960,2780 ; U8.4@1675,2517.78 1675,2575 ; 939.61,2780 cw(c939.61,2802.92) 921.49,2788.89 ccw(c939.61,2802.92) 939.61,2780 ; 939.61,2780 ccw(c939.61,2757.08) 921.49,2771.11 cw(c939.61,2757.08) 939.61,2780 ; 960,2780 cw(c960,2818.69) 929.4,2795.01 ccw(c960,2818.69) 960,2780 ; 960,2780 ccw(c960,2741.31) 929.4,2764.99 cw(c960,2741.31) 960,2780 ; 960,2780 1145,2595 1655,2595 1675,2575 ; 1675,2551.67 cw(c1642.73,2551.67) 1664.98,2528.3 ccw(c1642.73,2551.67) 1675,2551.67 ; 1675,2551.67 ccw(c1707.27,2551.67) 1685.02,2528.3 cw(c1707.27,2551.67) 1675,2551.67 ; 1675,2575 cw(c1620.52,2575) 1658.09,2535.54 ccw(c1620.52,2575) 1675,2575 ; 1675,2575 ccw(c1729.48,2575) 1691.91,2535.54 cw(c1729.48,2575) 1675,2575
pads on no net: I1.20 I1.21 P1.7 P1.9 P1.10 P3.2 P3.4 P3.6 U1.1 U1.4 U2.1 U2.4 U3.1 U3.4 U4.1 U4.4 U7.1 U7.4 U9.1 U9.4 U11.1 U11.4

## Polygon pours and split planes (outlines as drawn)
GND on Top Layer "Top Layer-No Net" (hatched 90Degree grid 10 track 10, remove dead copper, pour order 4): -1195,3400 -1170,3375 -1170,-355 5925,-355 5960,-390 6110,-240 6110,3290 -1085,3290 -1185,3390
GND on Bottom Layer "Top Layer-No Net" (hatched 90Degree grid 10 track 10, remove dead copper, pour order 6): -1330,3450 -1345,3435 -1345,-380 5770,-380 6000,-610 5780,-390 5780,2210 5780,3365 5630,3515 5530,3415 -1320,3415

## Keep-outs
Keep-Out Layer:
  lines w10: -950,25 -950,3095 ; -950,35 ccw(c-912.5,32.5) -915,-5 ; -950,3090 cw(c-925,3090) -925,3115 ; -930,3115 5410,3115 cw(c5405,3070) 5450,3065 5450,30 ; -920,-5 5415,-5 ccw(c5410,35) 5450,40 ; 5400,-5 5410,-5

## Text inside footprints (layer, text, board x,y; h text height)
P1: Top Overlay "2" at 4585,1141.85 h50 r270; Top Overlay "1" at 4485,1121.85 h50 r270; Top Overlay "9" at 4485,581.85 h50 r270; Top Overlay "10" at 4585,581.85 h50 r270
P2: Top Overlay "8" at 830,2940 h50 r90; Top Overlay "7" at 930,2940 h50 r90; Top Overlay "1" at 930,2500 h50 r90; Top Overlay "2" at 830,2480 h50 r90
P3: Top Overlay "2" at 1338.46,1141.85 h50 r270; Top Overlay "1" at 1238.46,1121.85 h50 r270; Top Overlay "9" at 1238.46,581.85 h50 r270; Top Overlay "10" at 1338.46,581.85 h50 r270